# Altium PCB BMW E34 Start-Stop Btn v2.PcbDoc
Units mm, origin at the board's own origin, x right, y up, seen from the top; angles counter-clockwise.
Board outline 152.4 x 101.6 mm, 2 copper layers (Top Layer, Bottom Layer); 44 components, 25 nets, 118 pads, 3 vias.
Unrouted connection lines stored in the file: 62.
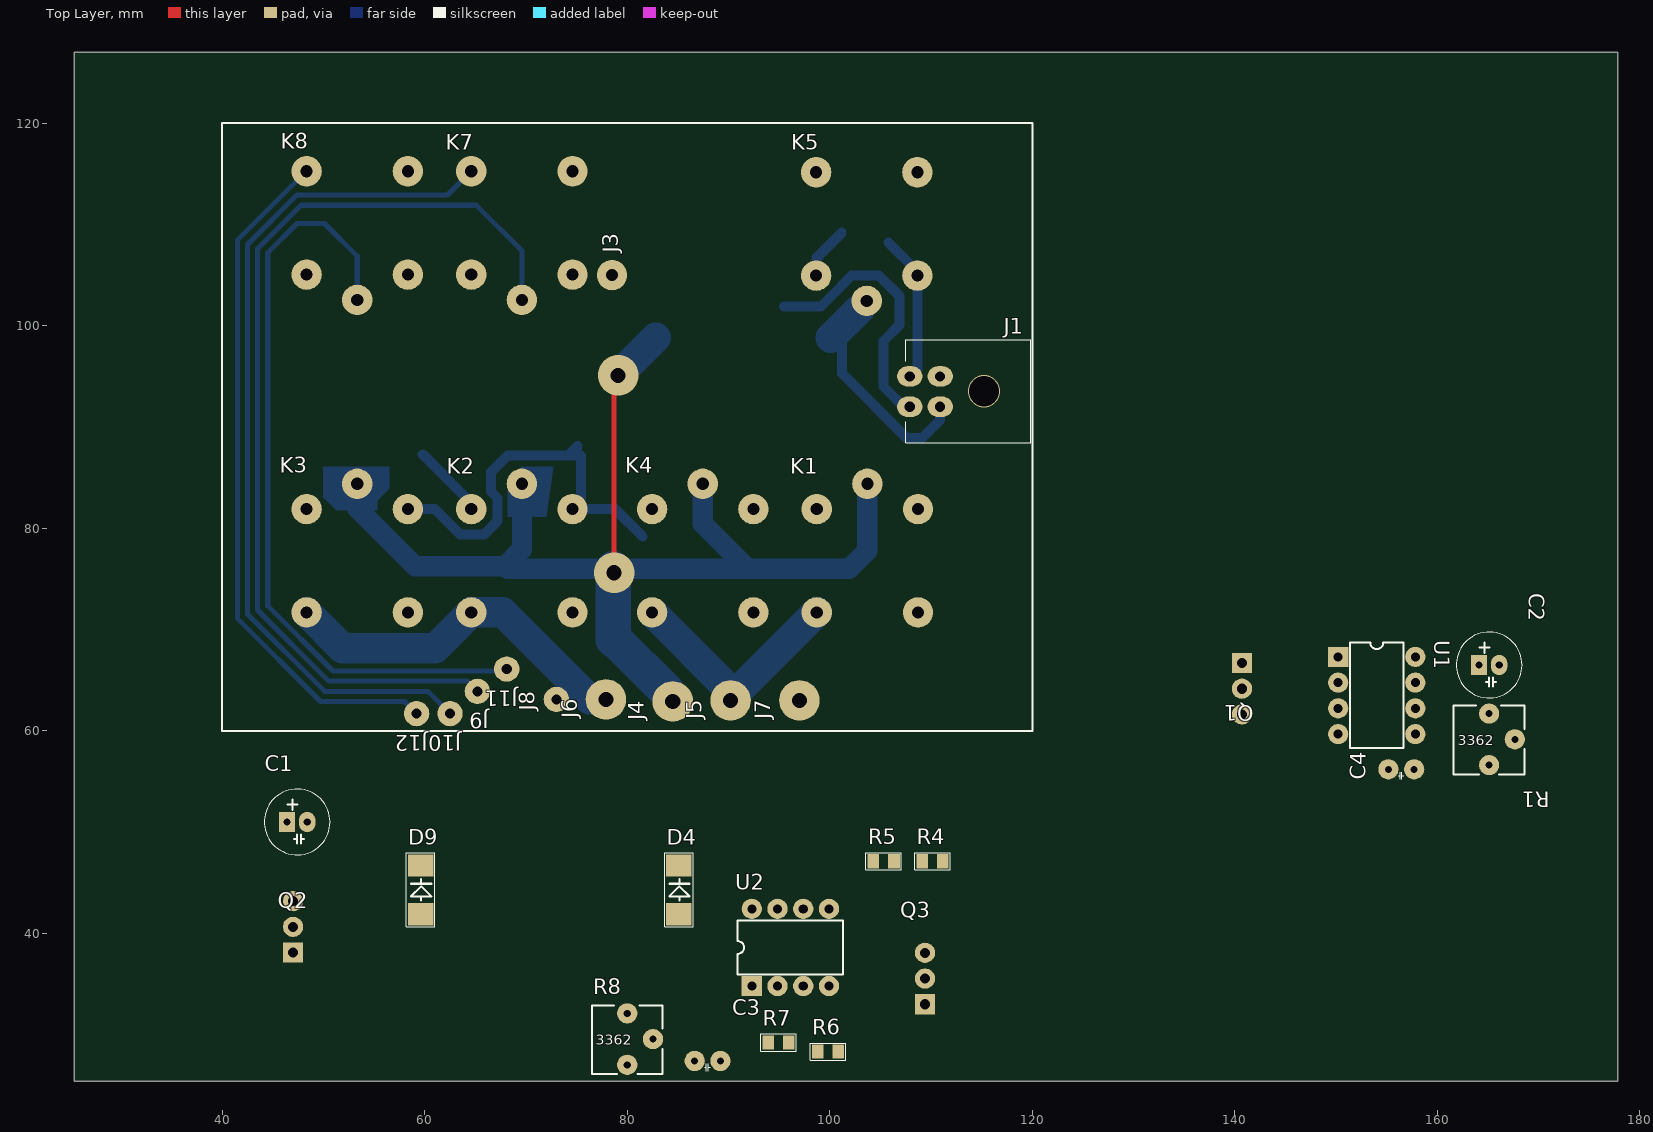
[diagram p0: Top Layer view]
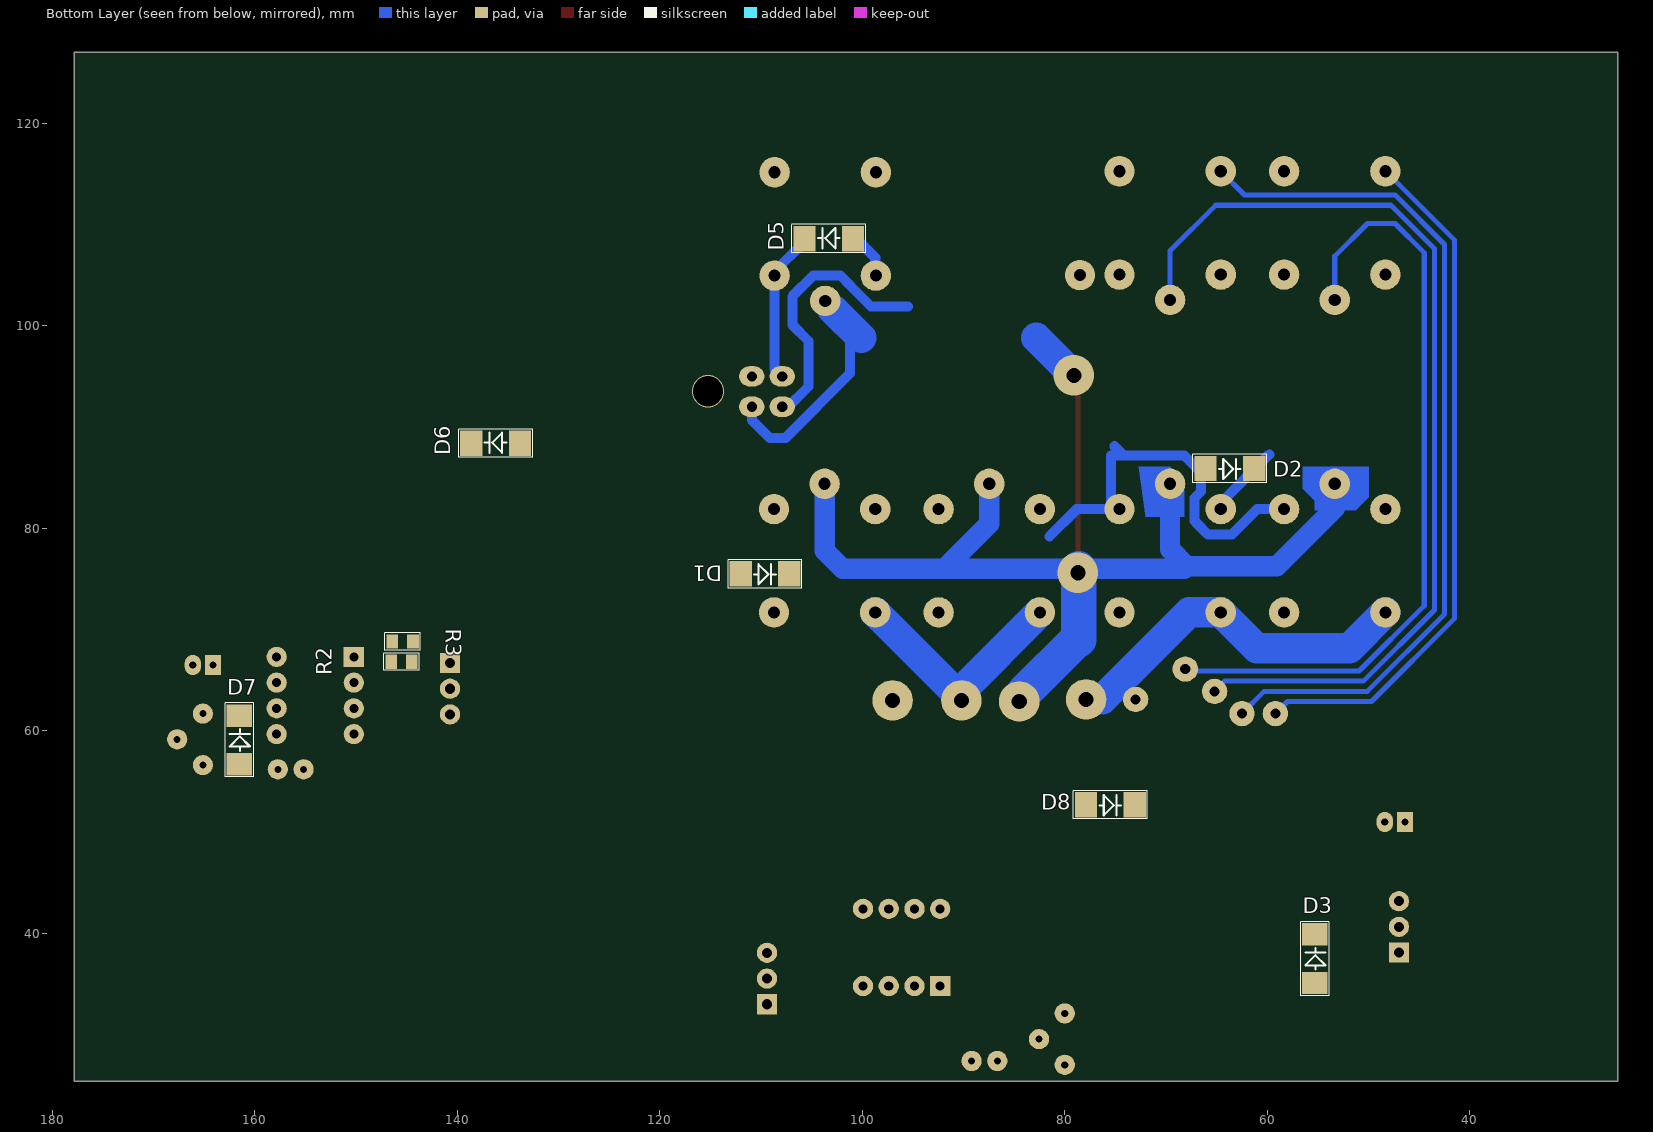
[diagram p1: Bottom Layer view, seen from below]

## Layer stack, top to bottom
Top Solder: solder mask 0.0102, Solder Resist, Dk 3.5
Top Layer: signal copper 0.0356
Dielectric 1: dielectric 0.32, FR-4, Dk 4.8
Bottom Layer: signal copper 0.0356
Bottom Solder: solder mask 0.0102, Solder Resist, Dk 3.5

## Board outline
25.4,25.4 177.8,25.4 177.8,127 25.4,127

## Design rules (kind name [scope] priority, off if disabled: settings)
Clearance [All] p1: gap=0.5
ComponentClearance [All] p1: gap=0 collisioncheckmode=3 verticalgap=0 showdistances=FALSE
PlaneConnect [All] p1: planeconnectstyle=Relief reliefexpansion=0.508 reliefentries=4 reliefconductorwidth=0.5 reliefairgap=0.5
PolygonConnect [All] p1: connectstyle=Relief reliefconductorwidth=0.5 reliefentries=4 polygonreliefangle="90 Angle" airgapwidth=0.5
RoutingVias [All] p1: holewidth=0.711 width=1.27 viastyle="Through Hole" minholewidth=0.711 minwidth=1.27 maxholewidth=0.711 maxwidth=1.27
SolderMaskExpansion [All] p1: expansion=0.102
Width [All] p1: maxlimit=5 minlimit=0.5 preferedwidth=2
27 further rules are at their usual default settings.

## Components (designator, comment, footprint, x,y, rotation, side; value= is the part's Value field where it differs from the comment)
C1 "10uF 25V" "Cap E p2mm D6.5xH11" 46.4,51 r0 top
C2 "10uF 25V" "Cap E p2mm D6.5xH11" 164.1,66.5 r0 top
C3 "0.01mF" "Cap p2.54mm (2p)" 89.2,27.4 r180 top
C4 "0.01mF" "Cap p2.54mm (2p)" 157.7,56.2 r180 top
D1 "S1M" DO-214AC 112,75.5 r180 bottom
D2 "S1M" DO-214AC 66.1,85.9 r180 bottom
D3 "S1M" DO-214AC 55.3,35.1 r90 bottom
D4 "S1M" DO-214AC 85.1,41.9 r90 top
D5 "S1M" DO-214AC 100.9,108.6 r0 bottom
D6 "S1M" DO-214AC 133.8,88.4 r0 bottom
D7 "S1M" DO-214AC 161.5,56.7 r90 bottom
D8 "S1M" DO-214AC 77.9,52.7 r180 bottom
D9 "S1M" DO-214AC 59.6,41.9 r90 top
J1 "Ing Button" "Molex Micro-Fit 3.0 - 4 pin D R" 110.9,95 r90 top
J3 "GND" "OnePin 1.2x3" 78.5,105 r90 top
J4 "RED" "OnePin 1.5x4" 84.5,62.9 r90 top
J5 "GREEN" "OnePin 1.5x4" 90.2,63 r90 top
J6 "FIOLET" "OnePin 1.5x4" 77.9,63.1 r90 top
J7 "BL-Y (Starter)" "OnePin 1.5x4" 97,63 r90 top
J8 "Gr-W" "OnePin 1x2.5" 73,63.1 r90 top
J9 "Red-Green" "OnePin 1x2.5" 65.2,63.9 r180 top
J10 "Gray-Green" "OnePin 1x2.5" 62.5,61.7 r180 top
J11 "Red-Blue" "OnePin 1x2.5" 68.1,66.1 r180 top
J12 "Gray-Blue" "OnePin 1x2.5" 59.2,61.7 r180 top
K1 "SRA-12VDC-CL" SRA-12VDC-CL 103.709,84.391 r270 top
K2 "SRA-12VDC-CL" SRA-12VDC-CL 69.597,84.391 r270 top
K3 "SRA-12VDC-CL" SRA-12VDC-CL 53.341,84.391 r270 top
K4 "SRA-12VDC-CL" SRA-12VDC-CL 87.453,84.391 r270 top
K5 "SRA-12VDC-CL" SRA-12VDC-CL 103.653,102.452 r90 top
K7 "SRA-12VDC-CL" SRA-12VDC-CL 69.597,102.552 r90 top
K8 "SRA-12VDC-CL" SRA-12VDC-CL 53.341,102.552 r90 top
Q1 "TIP122" TO220-2 140.7,66.7 r180 top
Q2 "TIP127" TO220-2 47,38.1 r0 top
Q3 "TIP127" TO220-2 109.4,33 r0 top
R1 "100КOm" "Res Adj 3362P" 165.1,61.7 r0 top
R2 "560Om" "SMD 0805 (2012)" 146.5,66.8 r180 bottom
R3 "10kOm" "SMD 0805 (2012)" 146.4,68.8 r180 bottom
R4 "560Om" "SMD 0805 (2012)" 109.1,47.1 r0 top
R5 "3.3KOm" "SMD 0805 (2012)" 104.3,47.1 r0 top
R6 "560Om" "SMD 0805 (2012)" 98.8,28.3 r0 top
R7 "3.3KOm" "SMD 0805 (2012)" 93.9,29.2 r0 top
R8 "100КOm" "Res Adj 3362P" 80,32.1 r0 top
U1 "NE555" DIP-8 150.2,67.3 r270 top
U2 "NE555" DIP-8 92.3,34.8 r0 top

## Footprints (in the part's own frame and the unit in brackets; to place one, negate y for a bottom-side part, rotate by r counter-clockwise, add the part's x,y. Pads: shape width x height; smd on the part's side, far side on the other; paste and mask are expansions set on the pad)
"Cap E p2mm D6.5xH11" [mm] "D 6.5mm; H 11mm"
  rect 1.6x2 hole 0.7: 1(0,0)
  oval 1.6x2 hole 0.7: 2(2,0)
  silkscreen extent -2.25,-3.25 4.25,3.25, body extent -2.22,-3.22 4.27,3.28, height 11.49
"Cap p2.54mm (2p)" [mm] "Disk small"
  round 2 hole 0.7: 1(0,0) 2(2.54,0)
  silkscreen extent 1.02,0.27 1.55,1, body extent -1.5,-1.22 4,1.28, height 5.5
DIP-8 [mm] "DIP; 8 Leads; Row Spacing 7.62 mm; Pitch 2.54 mm"
  rect 2x2 hole 0.9: 1(0,0)
  round 2 hole 0.9: 2(2.54,0) 3(5.08,0) 4(7.62,0) 5(7.62,7.62) 6(5.08,7.62) 7(2.54,7.62) 8(0,7.62)
  silkscreen extent -1.41,1.16 9,6.46, body extent -1.9,-0.14 9.53,7.74, height 4.19
DO-214AC [mm]
  rect 2.2x2.5 smd: A(0,0) K(4.8,0)
  silkscreen extent -1.25,-1.4 6.05,1.4, body extent -0.42,-1.4 5.08,1.4, height 2.6
"Molex Micro-Fit 3.0 - 4 pin D R" [mm]
  oval 2x2.5 hole 1: 1(0,0) 2(-3,0) 3(0,3) 4(-3,3)
  silkscreen extent -6.58,-8.95 3.6,3.4, body extent -6.55,-8.94 3.6,3.3, height 8.83
"OnePin 1.2x3" [mm]
  round 3 hole 1.2: 1(0,0)
"OnePin 1.5x4" [mm]
  round 4 hole 1.5: 1(0,0)
"OnePin 1x2.5" [mm]
  round 2.5 hole 1: 1(0,0)
"Res Adj 3362P" [mm]
  round 2 hole 0.7: 1(0,0) 2(2.54,-2.54) 3(0,-5.08)
  silkscreen extent -3.5,-6 3.5,0.8, body extent -3.54,-5.95 3.5,0.75, height 4.69
"SMD 0805 (2012)" [mil]
  rect 45x55 smd: 1(0.35,0.98) 2(80.35,0.98)
  silkscreen extent -29,-32 109,34, body extent 1,-24 80,26, height 18
SRA-12VDC-CL [mm]
  round 3 hole 1.2: 1(12.7,5) 2(0,0) 3(12.7,-5) 4(2.5,-5) 5(2.5,5)
  body extent -3,-8 17,8, height 15
TO220-2 [mm]
  rect 2x2 hole 1: 1(0,0)
  round 2 hole 1: 2(0,2.54) 3(0,5.08)
  body extent -2.7,-2.65 1.8,7.75, height 19

## Part data
C1 C2: library part "Cap E 220mF x 16V", "Capacitor"
C3 C4: library part "Cap Ceramic", "Capacitor"
D1 D2 D3 D4 D5 D6 D7 D8 D9: library part "Diode S1M", "1 Amp General Purpose Rectifier"
J1: library part "Micro-Fit 4R (2x2)", "Horisontal, Dbl line, Male - 3mm"
J3 J4 J5 J6 J7 J8 J9 J10 J11 J12: library part "OnePin Connector", "Only pad"
K1 K2 K3 K4 K5 K7 K8: "Single-Pole Dual-Throw Relay"
Q1: "NPN Darlington 5A, 65W, 100V, h>1000"
Q2 Q3: "PNP Darlington Bipolar Transistor"
R1 R8: library part "Res Adj 3362"
R2 R3 R4 R5 R6 R7: library part "Res All Types"
U1 U2: "8-Bit Shift Register with 3-State Output Registers"

## Via types
v1: diameter 4, hole 1.5, Top Layer to Bottom Layer, 2 vias
v2: diameter 3.2, hole 3, Top Layer to Bottom Layer, 1 vias

## Nets (pads, with @x,y where several pads share a name; then routed paths per layer and width w, separated by ;. In a path a pad name is that pad's centre, name@x,y a point inside that pad or via, vN(x,y) a via of type N, cw(c..) or ccw(c..) an arc to the next point about the centre after c; other vN are vias at no path point)
G1GND: D2.A K2.5 K3.5 Q3.3 | length 39.8
  Bottom Layer w1: K3.5 61.009,81.891 63.509,79.391 65.867,79.391 67.057,80.581 ; 67.184,80.708 67.184,82.994 66.549,83.629 66.549,85.534 68.2,87.185 75.417,87.185 75.417,82.711 K2.5 78.809,81.891 81.5,79.2 ; 74.185,87.185 75.1,88.1
G2GND: D1.A K1.5 K4.5 Q1.2
GND: C3.2 C4.2 D5.A D7.A D8.A D9.A J3.1 K5.5 K7.5 K8.5 Q2.2 Q3.2 R1.2 R1.3 R3.1 R5.1 R7.1 R8.2 R8.3 U1.1 U2.1 | length 4.4
  Bottom Layer w1: K7.5@64.597,104.597 K7.5 ; K5.5@98.709,106.291 98.709,106.723 D5.A@101.169,109.183
GR-B: J12.1 K8.1 | length 68.6
  Bottom Layer w0.5: K8.1 48.309,115.252 41.5,108.443 41.5,71.107 49.707,62.9 58,62.9 J12.1
GR-GR: J10.1 K7.1 | length 85.7
  Bottom Layer w0.5: J10.1 60.3,63.9 50.122,63.9 42.5,71.522 42.5,108.028 47.372,112.9 62.245,112.9 K7.1
"GROUP1 OUT": D6.A D8.K J6.1 J8.1 K2.3 K3.3 K7.4 | length 36.1
  Bottom Layer w3: K3.3 51.882,68.15 61.056,68.15 K2.3 67.709,71.691 76.3,63.1 J6.1
GROUP2: R2.1 U1.3
"GROUP2 OUT": D4.A J5.1 K1.3 K4.3 | length 22.7
  Bottom Layer w3: K4.3@82.5,71.644 90.344,63.8 90.818,63.8 K1.3
I-OFF: C1.1 J1.4 U2.4 U2.8 | length 26.4
  Bottom Layer w1: 95.5,101.9 99.137,101.9 101.153,103.916 101.153,103.953 102.152,104.952 104.848,104.952 106.9,102.9 106.9,100.1 105.3,98.5 105.3,94 J1.4@107.6,91.7
I-ON: C2.1 D3.A J1.1 U1.4 U1.8
NetC1_2: C1.2 D9.K R8.1 U2.2 U2.6
NetC2_2: C2.2 D7.K R1.1 U1.2 U1.6
NetC3_1: C3.1 U2.5
NetC4_1: C4.1 U1.5
NetD2_K: D2.K D3.K D6.K K2.4 K3.4 | length 7.4
  Bottom Layer w1: 59.8,87.3 64.597,82.503 K2.4
NetQ1_1: Q1.1 R2.2 R3.2
NetQ1_3: Q1.3 Q2.3
NetQ2_1: Q2.1 R4.2 R5.2
NetQ3_1: Q3.1 R6.2 R7.2
NetR6_1: R6.1 U2.3
R-B: J11.1 K8.2 | length 76.9
  Bottom Layer w0.5: K8.2 53.341,106.859 50.1,110.1 47.4,110.1 44.5,107.2 44.5,72.35 50.95,65.9 67.9,65.9 J11.1
R-GR: J9.1 K7.2 | length 95.5
  Bottom Layer w0.5: J9.1 64.2,64.9 50.536,64.9 43.5,71.936 43.5,107.614 47.786,111.9 65.1,111.9 69.597,107.403 K7.2 K7.2@69.736,102.691
"STARTER OUT": J7.1 K5.3
STARTERON: D5.K J1.3 K5.4 | length 14.7
  Bottom Layer w1: D5.K@105.786,108.214 108.653,105.347 K5.4 108.65,104.949 108.65,95.75 J1.3
VCC: D1.K D4.K J1.2 J4.1 K1.2 K1.4 K2.2 K3.2 K4.2 K4.4 K5.2 | length 150.7
  Top Layer w0.5: v1(78.7,75.6) v1@78.7,95 ; v1(79.1,95.1) v1@79.1,96.7
  Bottom Layer w1: K5.2@103.6,102.452 101.2,100.052 101.2,95.3 107.6,88.9 109.1,88.9 110.9,90.7 J1.2 ; K5.2@103.653,101.147 K5.2
  Bottom Layer w2: K3.2 53.341,81.978 59.056,76.263 67.946,76.263 69.597,77.914 K2.2 ; 68.2,76.009 78.8,76.009 91.898,76.009 ; J4.1@84,62.8 J4.1@84,63.8 ; K4.2 87.453,80.454 91.898,76.009 ; K1.2 103.709,77.787 101.931,76.009 91.898,76.009
  Bottom Layer w3: v1(79.1,95.1) 82.8,98.8 ; 100.1,98.8 K5.2@102.952,101.652
  Bottom Layer w3.5: 78.6,69 v1@78.6,76.009 ; 78.8,69 J4.1@84,63.8
pads on no net: K1.1 K2.1 K3.1 K4.1 K5.1 K7.3 K8.3 K8.4 R4.1 U1.7 U2.7
copper on no net:
  other v2: 115.225,93.525

## Other copper
Bottom Layer:
  region net VCC: 56.5,86.1 50,86.1 50,83.072 51.272,81.8 55.3,81.8 55.3,82.7 56.5,83.9
  region net VCC: 69.6,86.1 72.7,86.1 72,81.1 68.185,81.135 68.2,83.8

## Silkscreen, mask and mechanical layers (free items; w line width, h text height)
Top Overlay:
  lines w0.2: 40,60 40,120 120,120 120,60 40,60

## Text inside footprints (layer, text, board x,y; h text height)
R1: Top Overlay "3362" at 162,58.6 h1
R8: Top Overlay "3362" at 76.9,29 h1